# Altium PCB PCB1.PcbDoc
Units mm, origin at the board's own origin, x right, y up, seen from the top; angles counter-clockwise.
Board outline 50.42 x 36.58 mm, 2 copper layers (Top Layer, Bottom Layer); 28 components, 18 nets, 121 pads, 8 vias.
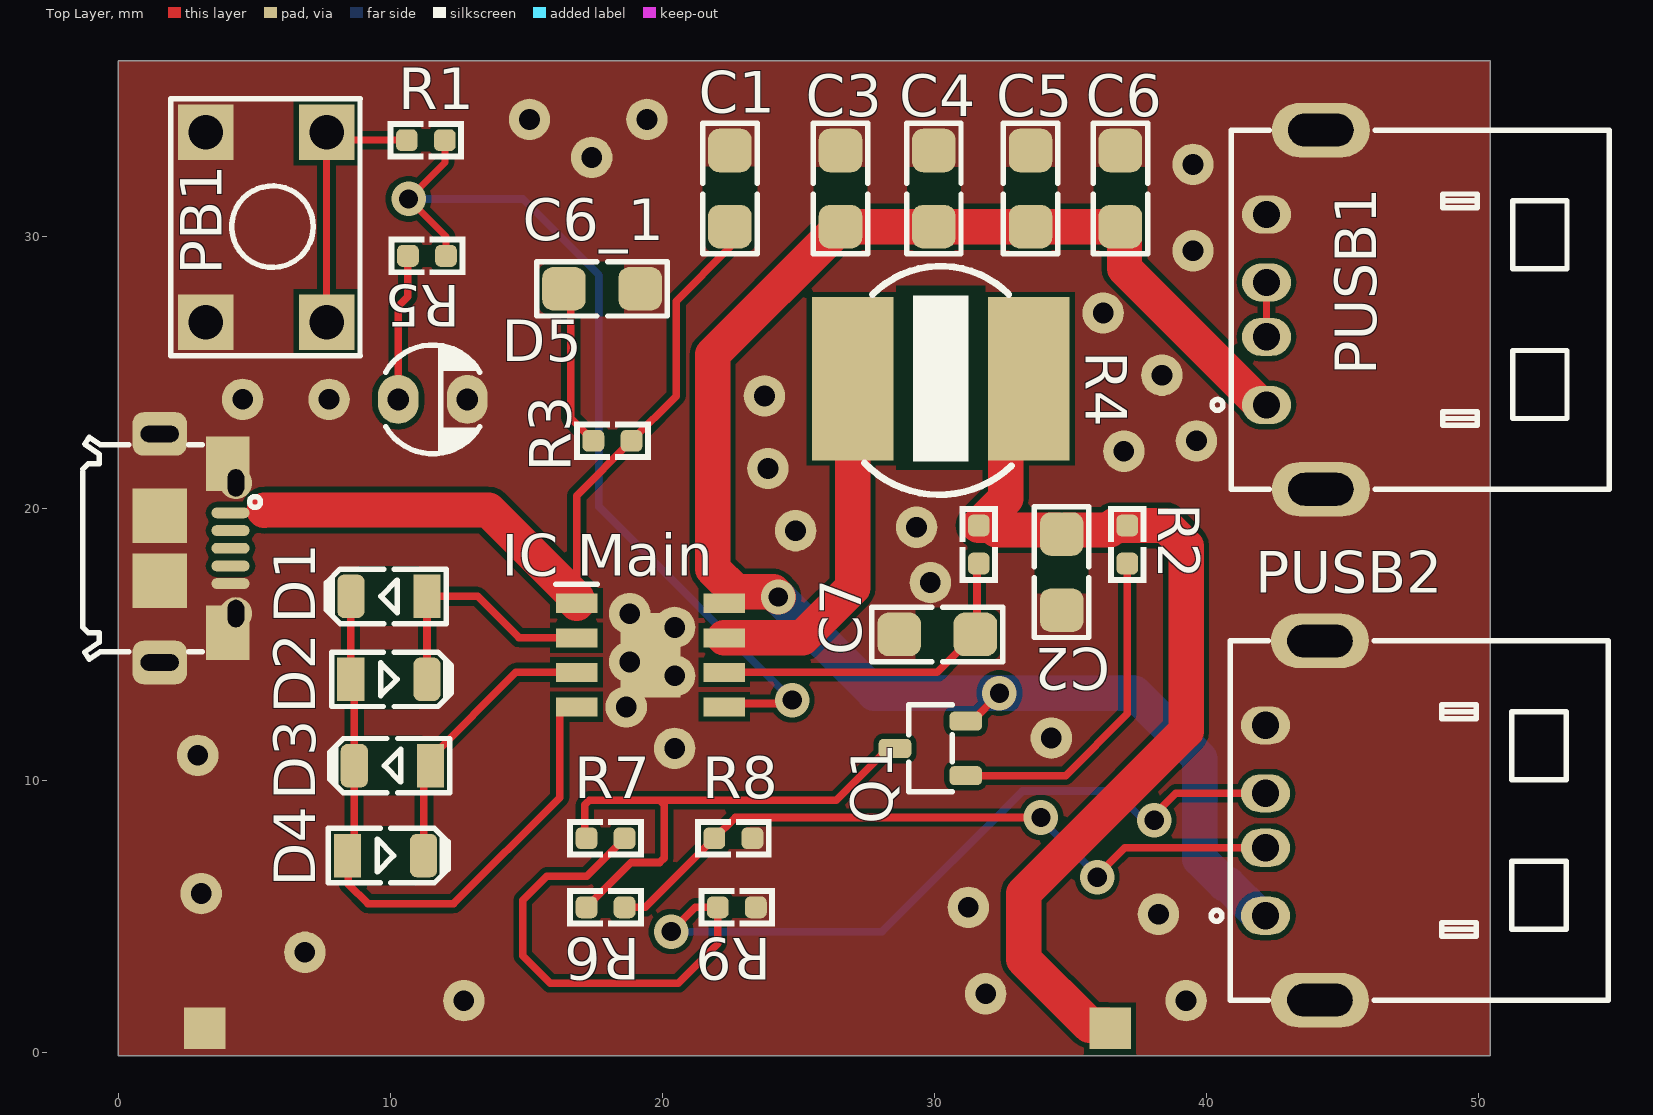
[diagram p0: Top Layer view]
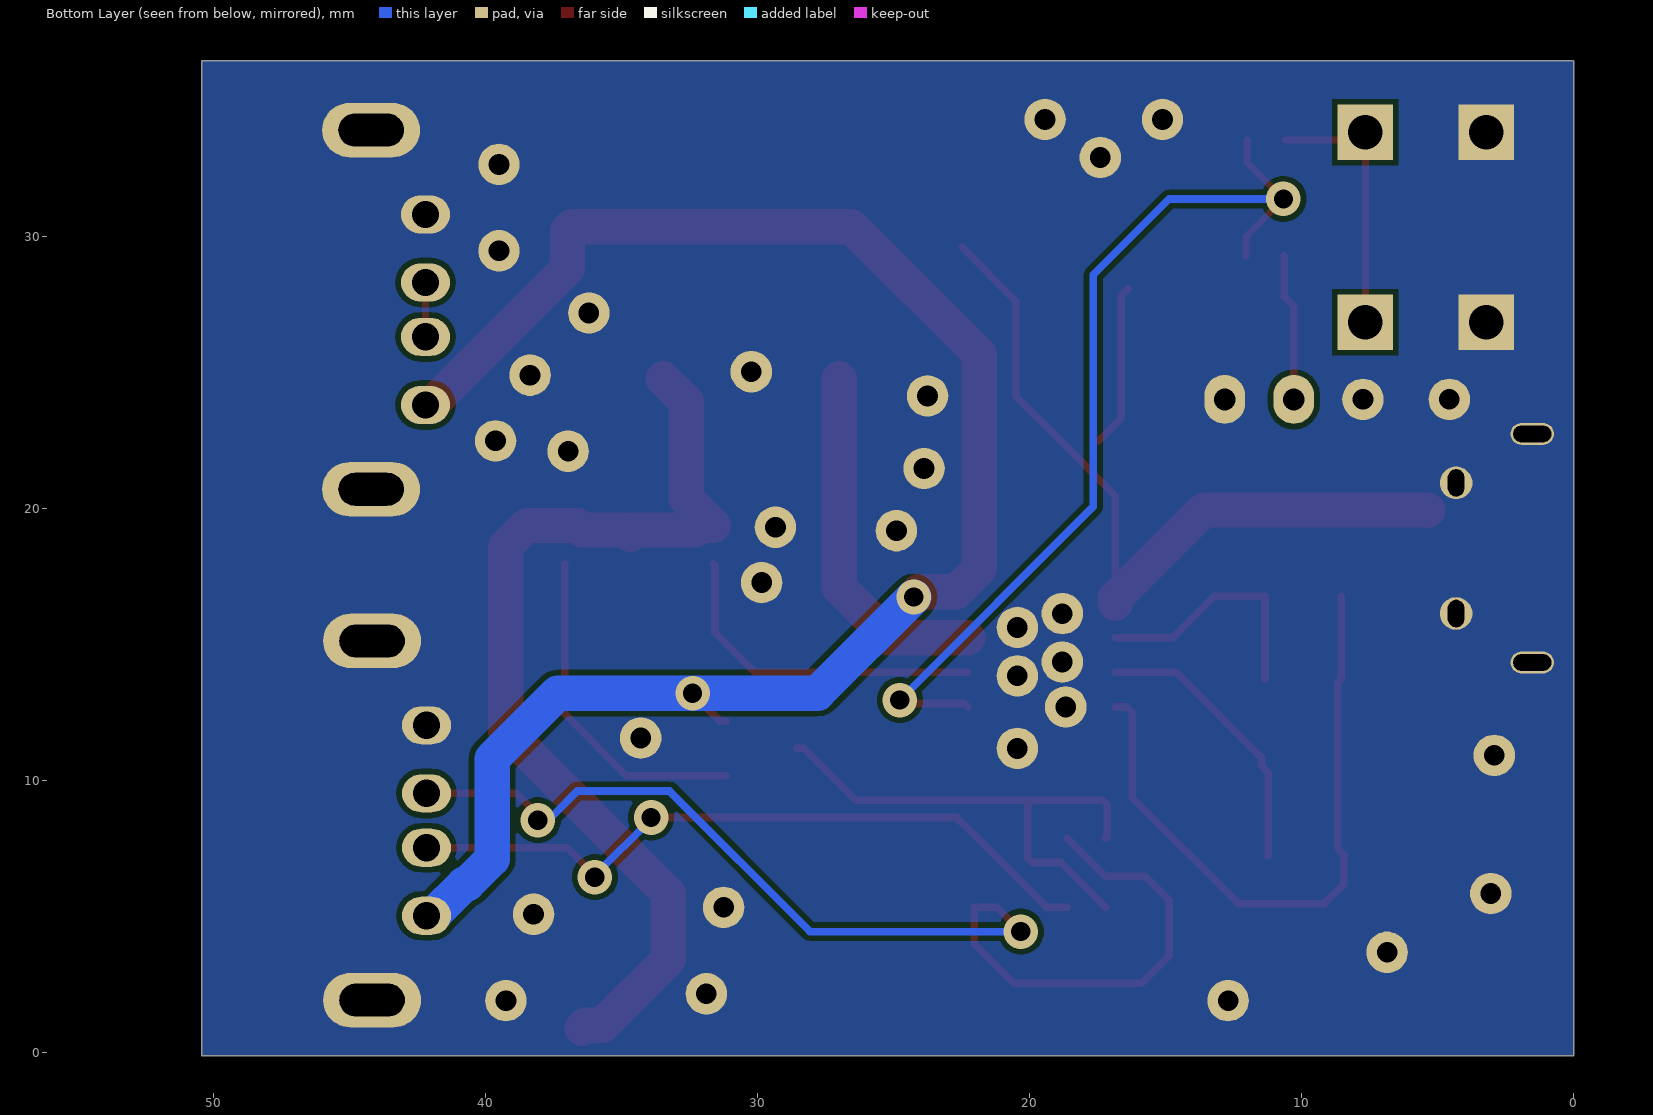
[diagram p1: Bottom Layer view, seen from below]
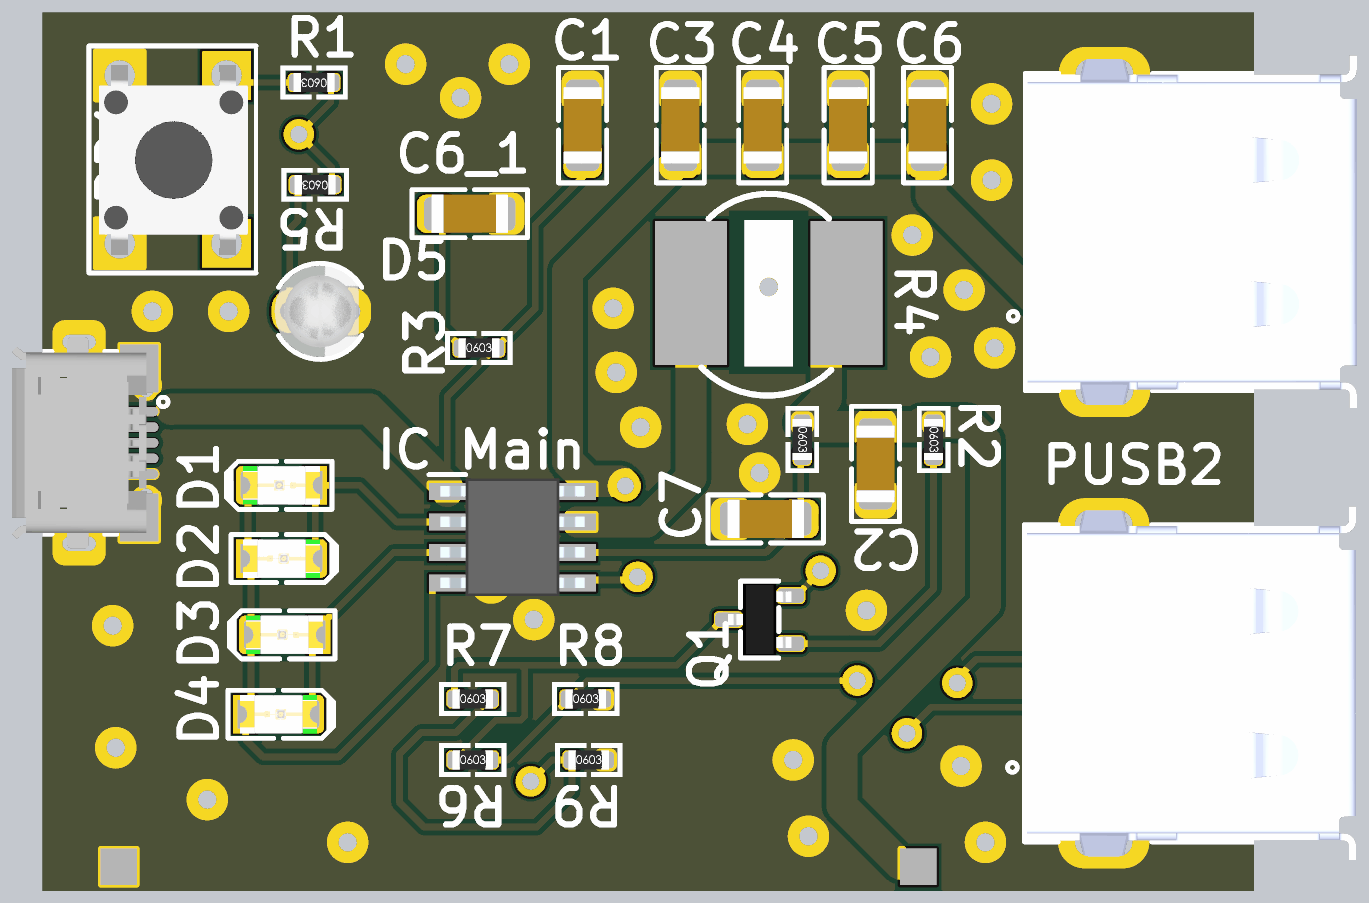
[diagram p2: 3D render of the assembled board from above, using the file's embedded part models]

## Layer stack, top to bottom
Top Solder: solder mask 0.0102, Solder Resist, Dk 3.5
Top Layer: signal copper 0.0356
Dielectric 1: dielectric 0.32, FR-4, Dk 4.8
Bottom Layer: signal copper 0.0356
Bottom Solder: solder mask 0.0102, Solder Resist, Dk 3.5

## Board outline
0,-0.127 50.419,-0.127 50.419,36.449 0,36.449

## Design rules (kind name [scope] priority, off if disabled: settings)
Clearance [All] p1: gap=0.2 ignorepadtopadclearanceinfootprint=FALSE
PlaneConnect [All] p1: planeconnectstyle=Direct reliefexpansion=0.508 reliefentries=4 reliefconductorwidth=0.254 reliefairgap=0.254
PolygonConnect [All] p1: thpad.connectstyle=Direct thpad.reliefconductorwidth=0.254 thpad.reliefentries=4 thpad.polygonreliefangle="90 Angle" thpad.airgapwidth=0.254 smdpad.connectstyle=Direct smdpad.reliefconductorwidth=0.254 smdpad.reliefentries=4 smdpad.polygonreliefangle="90 Angle" smdpad.airgapwidth=0.254 via.connectstyle=Relief via.reliefconductorwidth=0.254 via.reliefentries=4 via.polygonreliefangle="90 Angle" via.airgapwidth=0.254
RoutingVias [All] p1: holewidth=0.711 width=1.27 viastyle="Through Hole" minholewidth=0.711 minwidth=1.27 maxholewidth=0.711 maxwidth=1.27
SolderMaskExpansion [All] p1: expansion=0.102 istentingtop=FALSE
Width [All] p1: maxlimit=1.3 minlimit=0.26 preferedwidth=0.8
29 further rules are at their usual default settings.

## Components (designator, comment, footprint, x,y, rotation, side; value= is the part's Value field where it differs from the comment)
C1 "10uF" C1206 22.479,31.75 r270 top
C2 "22uF" C1206 34.671,17.653 r90 top
C3 "22uF" C1206 26.543,31.75 r270 top
C4 "22uF" C1206 29.972,31.75 r270 top
C5 "22uF" C1206 33.528,31.75 r270 top
C6 "22uF" C1206 36.83,31.75 r270 top
C6_1 "10uF" C1206 17.78,28.067 r180 top
C7 "22uF" C1206 30.099,15.367 r0 top
D1 "LED1206WHT" LED1206WHT 9.949,16.764 r180 top
D2 "LED1206WHT" LED1206WHT 9.946,13.716 r0 top
D3 "LED1206WHT" LED1206WHT 10.076,10.541 r180 top
D4 "LED1206WHT" LED1206WHT 9.822,7.239 r0 top
D5 "LED3MM" LED3MM 11.557,24.003 r0 top
"IC Main" "IP5306" SOIC127P600X165-9N 19.558,14.605 r0 top
PB1 "PushButton" uc_pb3 4.064,28.448 r270 top
PUSB1 "CONN_USB_A" USB_A_REC_RA_THD 42.196,27.301 r270 top
PUSB2 "CONN_USB_A" USB_A_REC_RA_THD 42.164,8.525 r270 top
Q1 "S8550" SOT23_3 29.845,11.176 r180 top
R1 "10K" R0603 11.303,33.528 r180 top
R2 "100K" R0603 37.084,18.669 r270 top
R3 "2R" R0603 18.161,22.479 r0 top
R4 "0.5R" R0603 31.623,18.669 r270 top
R5 "20R" R0603 11.346,29.276 r180 top
R6 "43K" R0603 17.907,5.334 r0 top
R7 "75K" R0603 17.907,7.874 r0 top
R8 "51K" R0603 22.606,7.874 r0 top
R9 "51K" R0603 22.733,5.334 r0 top
? "CONN_USB_MICROB_BM" USB_MICRO_AB_BM_SHS 4.124,18.533 r90 top

## Footprints (in the part's own frame and the unit in brackets; to place one, negate y for a bottom-side part, rotate by r counter-clockwise, add the part's x,y. Pads: shape width x height; smd on the part's side, far side on the other; paste and mask are expansions set on the pad)
C1206 [mm] "CHIP Capacitor, 3.2X1.6mm, 1206"
  rrect50% 1.6x1.6 smd paste-5 mask+0.075: 1(-1.4,0) 2(1.4,0)
  Top Layer pour cut-out: -0.8,1 -0.8,-1 0.8,-1 0.8,1
  silkscreen extent -2.4,-1 2.4,1, body extent -1.6,-0.8 1.6,0.8, height 1
LED3MM [mm] "LED THD 3MM"
  oval 1.5x1.8 hole 0.8: 1(-1.27,0) 2(1.27,0)
  silkscreen extent -1.73,-2 1.73,2, body extent -1.9,-1.9 1.6,1.9, height 6.5
LED1206WHT [mm] "LED, 1206, WHITE"
  rect 1x1.6 smd paste-0.2 mask+0.075: 1(-1.4,0)
  rrect50% 1x1.6 smd paste-0.2 mask+0.075: 2(1.4,0)
  Top Layer pour cut-out: -1.1,1.1 -1.1,-1.1 1.1,-1.1 1.1,1.1
  silkscreen extent -2.1,-1 2.3,1, body extent -1.6,-0.8 1.6,0.8, height 0.68
R0603 [mm] "CHIP Resistor 1/10 WATT, 1.6x0.8mm, 0603, OPTIMIZED"
  rrect50% 0.8x0.8 smd paste-5 mask+0.075: 1(-0.7,0) 2(0.7,0)
  Top Layer pour cut-out: -0.5,0.4 0.5,0.4 0.5,-0.4 -0.5,-0.4
  silkscreen extent -1.4,-0.7 1.4,0.7, body extent -0.85,-0.4 0.85,0.4, height 0.56
SOIC127P600X165-9N [mm]
  rect 1.525x0.7 smd: 1(-2.712,1.905) 2(-2.712,0.635) 3(-2.712,-0.635) 4(-2.712,-1.905) 5(2.712,-1.905) 6(2.712,-0.635) 7(2.712,0.635) 8(2.712,1.905)
  rect 2.21x3.1 smd: 9(0,0)
  silkscreen extent -3.47,2.61 -1.95,2.61, body extent -3,-2.45 3,2.45, height 1.65
SOT23_3 [mm] "SOT-23, Micro3, MO-178, TO-236AB, MO-193C, SuperSOT3, SC-59, 1.5x3mm, Pitch 1.9mm"
  rrect50% 1.2x0.7 smd paste-0.05 mask+0.1: 1(-1.3,1) 2(-1.3,-1) 3(1.3,0)
  silkscreen extent -0.8,-1.6 0.8,1.6, body extent -1.32,-1.5 1.32,1.5, height 1.08
uc_pb3 [mil]
  rect 80x80 hole 50: 1(-211.5,141.5) 1(63.5,141.5) 2(-211.5,-33.5) 2(63.5,-33.5)
  silkscreen extent -260,-84 112,190, body extent -229,-67 83,177, height 205
USB_A_REC_RA_THD [mm] "CONN, USB A, Receptacle, RIGHT ANGLE, THD"
  oval 1.4x1.8 hole 1: 1(3.5,0) 2(1,0) 3(-1,0) 4(-3.5,0)
  oval 2x3.6 hole 1.2 slot 2.4 at 90 deg: SH1(-6.6,2) SH2(6.6,2)
  silkscreen extent -6.6,-2 6.6,12.6, body extent -7.9,-1.2 7.9,12.5, height 6.95
USB_MICRO_AB_BM_SHS [mm] "CONN, USB Micro AB - Standard (Bottom mount), Shell THD, TE 1981584-1"
  oval 0.4x1.4 smd mask+0.05: 1(1.3,0) 2(0.65,0) 3(0,0) 4(-0.65,0) 5(-1.3,0)
  round 1.2 hole 0.6 slot 1 at 0 deg mask+0.05: SH1(-2.4,-0.2) SH2(2.4,-0.2)
  rect 2x2 smd: SH3(-1.2,2.6) SH4(1.2,2.6)
  rrect50% 1.6x2 / inner oval 0.8x1.6 / far side oval 0.8x1.6 hole 0.6 slot 1.4 at 90 deg: SH5(-4.2,2.6) SH6(4.2,2.6)
  rect 2x1.6 smd: SH7(-3.1,0.1) SH8(3.1,0.1)
  silkscreen extent -4.08,-1.1 4.08,5.43, body extent -4.4,-0.2 4.4,5.4, height 2.78

## Part data
C1 C6_1: library part CAP_SMD_FILM, "CAP, FILM, 10uF, 16V, Acryl, 20%, 1206", ASSEMBLY=ASSEMBLY, DESC=-, MANF=Murata, MANF_P#=-, PARAM="Acrylic, MetallizedStacked, 20%, -40~85oC", PARAM2=16V, PRICE="100= 40$"
C2 C3 C4 C5 C6 C7: library part CAP_SMD_FILM, "CAP, FILM, 680nF, 16V, Acryl, 20%, 1206", ASSEMBLY=ASSEMBLY, DESC=-, MANF=Murata, MANF_P#=-, PARAM="Acrylic, MetallizedStacked, 20%, -40~85oC", PARAM2=16V, PRICE="100= 40$"
D1 D2 D3 D4: library part LED_SMD_1206_WHT, "LED, SMD, 1206, WHITE", ASSEMBLY=ASSEMBLY, DESC=DESCRIPTION, MANF=MANF, MANF_P#=MANF_PART#, PARAM2=2.2V, PRICE=36t@Javan
D5: library part LED_THD_3MM, "LED, THD, 3MM, GREEN", ASSEMBLY=ASSEMBLY, DESC=DESCRIPTION, MANF=MANF, MANF_P#=MANF_PART#, PARAM2=2.2V, PRICE=PRICE
"IC Main": "Integrated Circuit", Manufacturer_Name=INJOINIC, Datasheet Link=https://datasheetspdf.com/pdf-file/1139129/Injoinic/IP5306/1, Height=1.65mm, Manufacturer_Part_Number=IP5306
PUSB1 PUSB2: library part CONN_USB_A_REC_RA_THD, "CONN, USB, A, RECEPTACLE, R/A, THD"
Q1: library part PNP_S8550_SOT23, "BJT, PNP, 25v, 0.5A, SMD, SOT23", MANF=-, MANF_P#=S8550, PARAM="25v, 0.5A", PARAM2=300mW
R1 R2 R3 R4 R5 R6 R7 R8 R9: library part RES_SMD_0603, "RESISTOR, SMD", ASSEMBLY=ASSEMBLY, DESC=DESCRIPTION, DIST#=MOUSER, MANF=-, MANF_P#=-, PARAM=0.1W, PARAM2=1%, PRICE="100= 0.5$"
?: library part CONN_USB_MICRO_AB_BM_SHS, "CONN, USB, MICRO AB, R/A, SMD, BOTTOM MOUNT", MANF=TE, MANF_P#=1981584-1, MANF_P#2="HIROSE ZX62-AB-5PA", PARAM="1.8A, -30~85oC", PARAM2=30VAC, PRICE=0.75$

## Free pads (board coordinates)
  rect 3x6 smd: 1(26.987,24.765) 2(33.465,24.765)
  rect 1.524x1.524 smd: 2(3.175,0.889) 3(36.449,0.889)
  round 1.524 hole 0.762: 4(18.796,16.129) 5(20.447,11.176) 6(29.845,17.272) 7(34.29,11.557) 8(23.749,24.13) 9(23.876,21.463) 10(24.892,19.177) 11(36.195,27.178) 12(38.354,24.892) 13(39.624,22.479) 14(36.957,22.098) 15(30.226,25.019) 16(29.337,19.304) 17(31.242,5.334) 18(31.877,2.159) 19(38.227,5.08) 20(39.243,1.905) 21(39.497,29.464) 22(39.497,32.639) 23(19.431,34.29) 24(15.113,34.29) 25(17.399,32.893) 26(4.572,24.003) 27(7.747,24.003) 28(2.921,10.922) 29(3.048,5.842) 30(6.858,3.683) 31(12.7,1.905) 32(20.447,15.621) 33(18.796,14.351) 34(20.447,13.843) 35(18.669,12.7)

## Via types
v1: diameter 1.27, hole 0.711, Top Layer to Bottom Layer, 8 vias

## Nets (pads, with @x,y where several pads share a name; then routed paths per layer and width w, separated by ;. In a path a pad name is that pad's centre, name@x,y a point inside that pad or via, vN(x,y) a via of type N, cw(c..) or ccw(c..) an arc to the next point about the centre after c; other vN are vias at no path point)
Batt+: C2.2 pad.2@33.465,24.765 pad.3 R2.1 R4.1 | length 36.2
  Top Layer w1.3: pad.2@33.465,24.765 32.615,23.915 32.615,20.361 R4.1 32.108,19.369 32.274,19.203 34.521,19.203 C2.2 34.821,19.203 36.433,19.203 36.599,19.369 R2.1 38.481,19.369 39.243,18.607 39.243,11.811 33.274,5.842 33.274,3.429 35.702,1.001 36.337,1.001 pad.3
DM: PUSB2.2 R6.2 R8.1 | length 26.4
  Top Layer w0.28: R6.2 19.366,5.334 R8.1 22.668,8.636 v1(33.909,8.636) ; v1(35.975,6.443) 35.975,6.511 36.989,7.525 PUSB2.2
  Bottom Layer w0.28: v1(33.909,8.636) 33.909,8.572 35.975,6.506 v1(35.975,6.443)
DP: PUSB2.3 R7.2 R9.1 | length 43.4
  Top Layer w0.28: R7.2 17.21,6.477 15.748,6.477 14.859,5.588 14.859,3.556 15.875,2.54 20.574,2.54 22.033,3.999 R9.1 21.209,5.334 v1(20.32,4.445) v1@20.193,4.445 ; v1(38.071,8.538) 38.071,8.734 38.862,9.525 PUSB2.3
  Bottom Layer w0.28: v1(20.32,4.445) 28.067,4.445 33.233,9.611 36.617,9.611 37.5,8.728 37.881,8.728 v1(38.071,8.538)
GND: "IC Main.9" ?.5 ?.SH1 ?.SH2 ?.SH3 ?.SH4 ?.SH5 ?.SH6 ?.SH7 ?.SH8 C1.1 C2.1 C3.1 C4.1 C5.1 C6.1 C6_1.1 C7.1 D5.2 pad.2@3.175,0.889 pad.4 pad.5 pad.6 pad.7 pad.8 pad.9 pad.10 pad.11 pad.12 pad.13 pad.14 pad.15 pad.16 pad.17 pad.18 pad.19 pad.20 pad.21 pad.22 pad.23 pad.24 pad.25 pad.26 pad.27 pad.28 pad.29 pad.30 pad.31 pad.32 pad.33 pad.34 pad.35 PB1.2 PUSB1.4 PUSB1.SH1 PUSB1.SH2 PUSB2.4 PUSB2.SH1 PUSB2.SH2 R8.2 R9.2
Net_1: "IC Main.1" ?.1 C1.2 R3.2 | length 28.4
  Top Layer w0.28: 16.846,16.698 16.846,20.464 R3.2 20.505,24.123 20.505,27.614 C1.2@22.479,29.588
  Top Layer w1: 16.733,16.51 16.846,16.51
  Top Layer w1.3: 5.367,19.925 5.381,19.939 13.604,19.939 16.846,16.698 16.846,16.51
NetC3_2: "IC Main.8" C3.2 C4.2 C5.2 C6.2 PUSB1.1 PUSB2.1 Q1.2 | length 63.1
  Top Layer w0.28: Q1.2 31.376,12.176 32.385,13.185 v1(32.385,13.208)
  Top Layer w1.3: v1(24.257,16.74) 24.065,16.932 22.692,16.932 21.844,17.78 21.844,25.651 C3.2 C4.2 C5.2 C6.2 36.98,30.2 36.98,28.817 41.996,23.801 PUSB1.1
  Bottom Layer w1.3: v1(24.257,16.74) 27.789,13.208 v1(32.385,13.208) 37.338,13.208 39.751,10.795 39.751,7.112 40.67,6.193 40.769,6.193 41.937,5.025 PUSB2.1
NetC6_1_2: C6_1.2 R3.1 | length 6
  Top Layer w0.28: C6_1.2 16.634,27.813 16.634,23.306 R3.1
NetC7_2: "IC Main.6" C7.2 R4.2 | length 12.5
  Top Layer w0.28: 22.27,13.97 30.102,13.97 C7.2 31.561,15.429 31.561,17.907 R4.2
NetD1_1: "IC Main.2" D1.1 D2.2 | length 9.2
  Top Layer w0.28: D2.2 11.346,16.761 D1.1 13.204,16.764 14.728,15.24 16.846,15.24
NetD1_2: "IC Main.4" D1.2 D2.1 D3.2 D4.1 | length 24.3
  Top Layer w0.28: D1.2 8.549,13.719 D2.1 8.676,13.586 D3.2 8.676,7.493 D4.1 8.458,7.203 8.458,6.183 9.18,5.461 12.319,5.461 16.223,9.365 16.223,12.49 16.434,12.7 16.846,12.7
NetD3_1: "IC Main.3" D3.1 D4.2 | length 10.4
  Top Layer w0.28: D4.2 11.222,10.287 D3.1 11.476,10.841 14.605,13.97 16.846,13.97
NetD5_1: D5.1 R5.2 | length 5.4
  Top Layer w0.28: D5.1 10.287,27.432 10.636,27.781 10.636,29.266 R5.2
"NetIC Main_5": "IC Main.5" R1.1 R5.1 | length 34.7
  Top Layer w0.26: R1.1 12.003,32.704 v1(10.668,31.369) 12.046,29.991 R5.1
  Top Layer w0.28: 22.27,12.7 22.397,12.827 24.638,12.827 v1(24.765,12.954)
  Bottom Layer w0.28: v1(10.668,31.369) 14.859,31.369 17.653,28.575 17.653,20.066 v1(24.765,12.954)
"NetIC Main_7": "IC Main.7" pad.1 | length 13.2
  Top Layer w1.3: 22.27,15.24 25.146,15.24 26.987,17.081 pad.1
NetPB1_1: PB1.1 R1.2 | length 10.1
  Top Layer w0.26: PB1.1@7.658,26.835 7.658,33.82 7.95,33.528 R1.2
NetPUSB1_2: PUSB1.2 PUSB1.3 | length 2
  Top Layer w0.26: PUSB1.2 PUSB1.3
NetQ1_1: Q1.1 R2.2 | length 12.4
  Top Layer w0.28: Q1.1 34.814,10.176 37.084,12.446 R2.2
NetQ1_3: Q1.3 R6.1 R7.1 | length 19.3
  Top Layer w0.28: R6.1 18.858,6.985 19.902,6.985 20.066,7.149 20.066,9.107 19.902,9.271 ; R7.1 17.145,7.936 17.145,9.107 17.309,9.271 19.902,9.271 ; Q1.3 28.295,11.176 26.39,9.271 19.902,9.271
pads on no net: ?.2 ?.3 ?.4

## Polygon pours and split planes (outlines as drawn)
GND on Top Layer "GND_L01_P004" (solid, pour order 4): 0,36.449 0,-0.127 50.419,-0.127 50.419,36.449
GND on Bottom Layer "GND_L02_P005" (solid, pour order 5): 0,36.449 0,-0.127 50.419,-0.127 50.419,36.449

## Other copper
Top Layer:
  pour cut-out: 28.575,28.194 31.877,28.194 31.877,21.399 28.575,21.399

## Silkscreen, mask and mechanical layers (free items; w line width, h text height)
Top Overlay:
  rectangle: 29.21,21.717 31.242,27.813
  lines w0.254: 27.426,21.665 ccw(c30.176,24.315) 32.826,21.565 ; 27.726,27.865 cw(c30.226,25.365) 32.726,27.865
Mechanical 14:
  circle w0.254: c30.226,24.701 r3.996
  lines w0.2: 25.146,21.336 35.306,21.336 35.306,28.258 35.115,28.258 25.4,28.258 25.146,28.258

## Text inside footprints (layer, text, board x,y; h text height)
?: Mechanical 1 "PCB EDGE" at -0.276,15.833 h0.8 r90